# Altium PCB Updated PCB_color Sensor Grp 14.pcbdoc
Units mil, origin at the board's own origin, x right, y up, seen from the top; angles counter-clockwise.
Board outline 4330 x 2560 mil, 2 copper layers (Top Layer, Bottom Layer); 32 components, 40 nets, 110 pads, 0 vias.
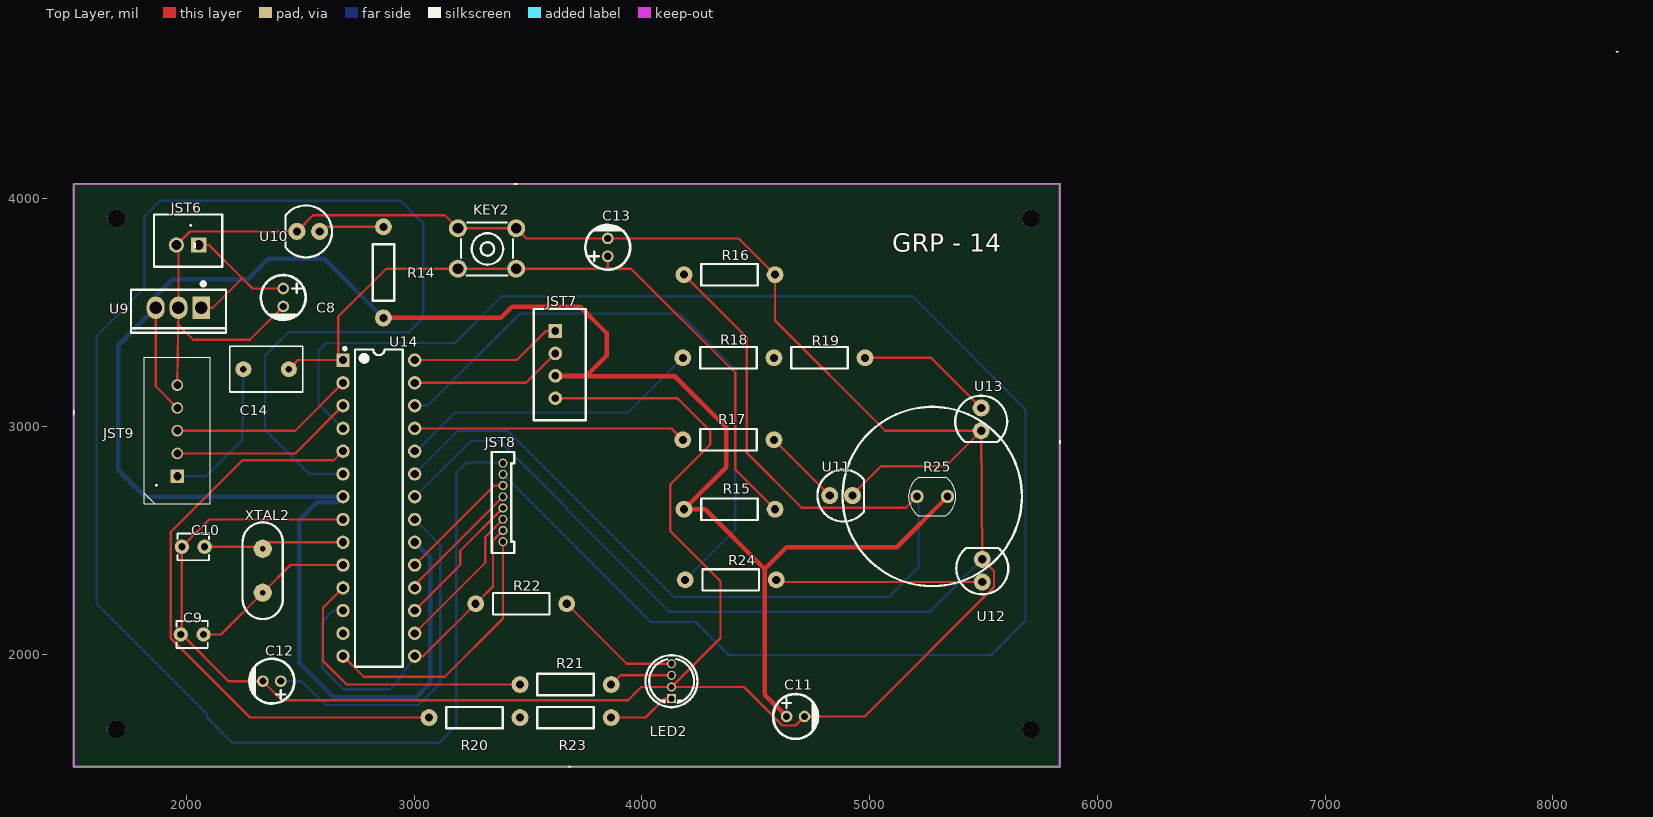
[diagram p0: Top Layer view]
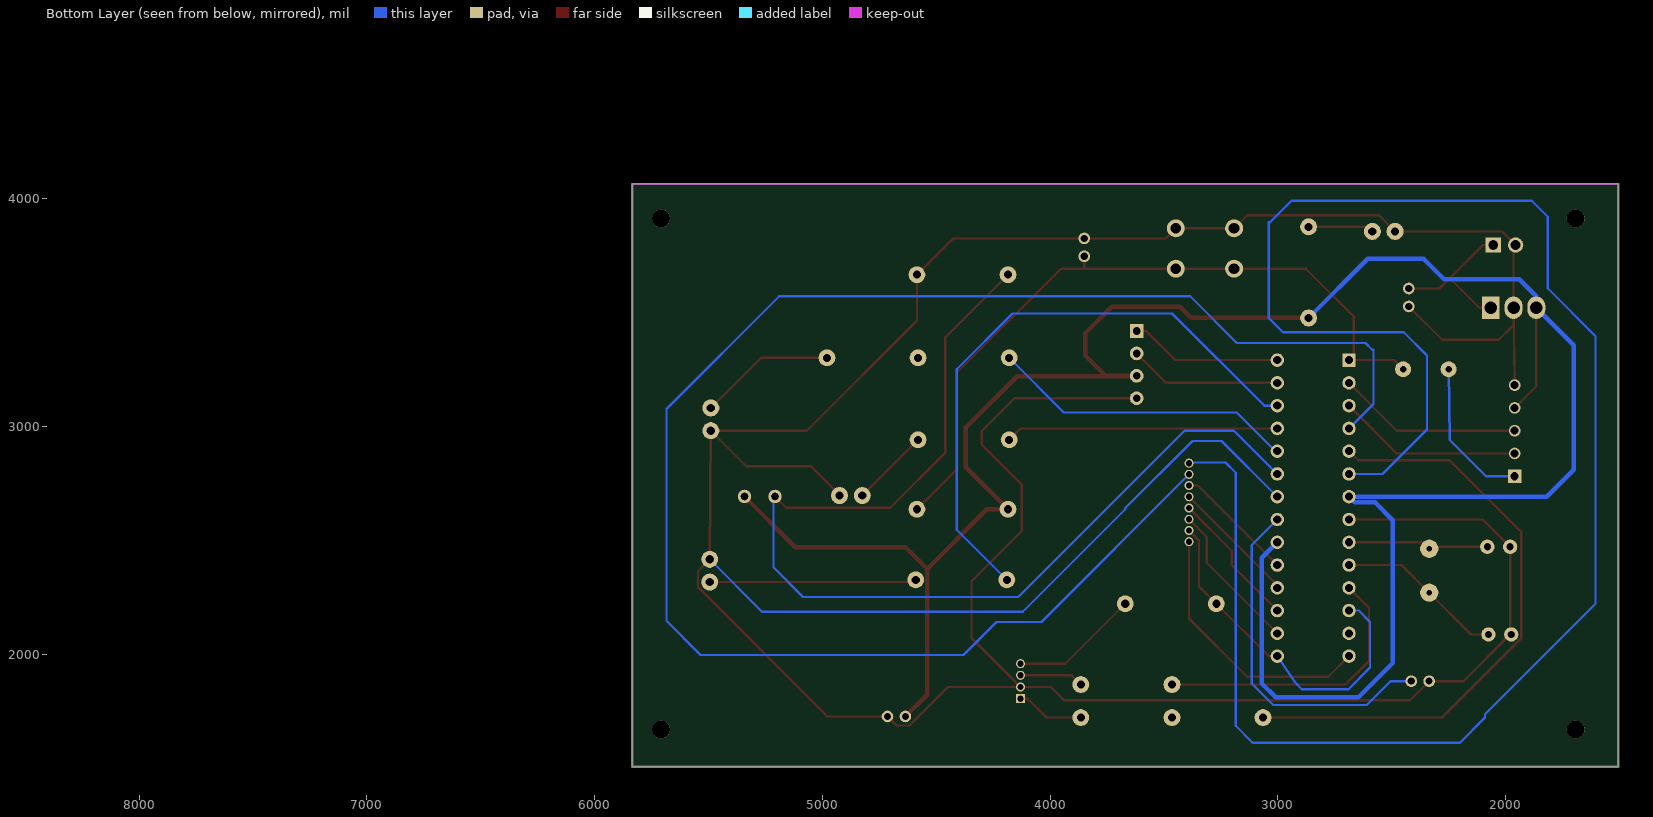
[diagram p1: Bottom Layer view, seen from below]

## Layer stack, top to bottom
Top Solder: solder mask 0.4, Solder Resist, Dk 3.5
Top Layer: signal copper 1.4
Dielectric1: dielectric 12.6, FR-4, Dk 4.8
Bottom Layer: signal copper 1.4
Bottom Solder: solder mask 0.4, Solder Resist, Dk 3.5

## Board outline
5835,1505 1505,1505 1505,4065 5835,4065

## Design rules (kind name [scope] priority, off if disabled: settings)
Clearance [All] p1: gap=10 ignorepadtopadclearanceinfootprint=FALSE except(0: Arc-Hole Track-Hole SMDPad-Hole THPad-Hole Via-Hole Fill-Hole Poly-Hole Region-Hole Text-Hole)
PolygonConnect [All] p1: connectstyle=Relief reliefconductorwidth=10 reliefentries=4 polygonreliefangle="90 Angle" airgapwidth=10
RoutingVias [All] p1: holewidth=28 width=50 viastyle="Through Hole" minholewidth=28 minwidth=50 maxholewidth=28 maxwidth=50
SolderMaskExpansion [All] p1: expansion=4 istentingtop=FALSE
Width [All] p1: maxlimit=10 minlimit=10 preferedwidth=10
30 further rules are at their usual default settings.

## Components (designator, comment, footprint, x,y, rotation, side; value= is the part's Value field where it differs from the comment)
C8 "330nF" CAP-TH_BD5.0-P2.00-D0.8-FD 2425,3565.95 r270 top
C9 "22pF" CAP-TH_L3.5-W3.0-P2.54-D0.8 2025,2085.95 r0 top
C10 "22pF" CAP-TH_L3.5-W3.0-P2.54-D0.8 2030,2470.95 r0 top
C11 "100nF" CAP-TH_BD5.0-P2.00-D0.8-FD 4675,1725.94 r0 top
C12 "100nF" CAP-TH_BD5.0-P2.00-D0.8-FD 2375,1880.94 r180 top
C13 "100nF" CAP-TH_BD5.0-P2.00-D0.8-FD 3850,3785.95 r90 top
C14 "100nF" RAD-0.2 2350,3250.95 r0 top
JST6 "POWER" CONN-TH_XHB-2A 2005,3795.95 r0 top
JST7 "JST_4 PIN" JST_XH_4_PIN_TOP_ENTRY 3620,3270.95 r0 top
JST8 "Keypad" 1X08-1.25MM_JST 3390,2665.95 r90 top
JST9 "FTDI" "JST 2.54MM MALE 5 PIN CONNECTOR" 1960,2980.95 r90 top
KEY2 "RST_BTN" KEY-TH_4P-L6.0-W6.0-P4.50 3320,3780.95 r180 top
LED2 "φ5 RGB Transparent" LED-TH_4P-BD5.8-P1.30 4130,1880.94 r270 top
R14 "330Ω" AXIAL-0.4 2865,3675.95 r90 top
R15 "10K" AXIAL-0.4 4385,2635.95 r180 top
R16 "1K" AXIAL-0.4 4385,3665.95 r0 top
R17 "330Ω" AXIAL-0.4 4380,2940.95 r0 top
R18 "330Ω" AXIAL-0.4 4380,3300.95 r0 top
R19 "330Ω" AXIAL-0.4 4780,3300.95 r0 top
R20 "330Ω" AXIAL-0.4 3265,1720.94 r0 top
R21 "330Ω" AXIAL-0.4 3665,1865.94 r0 top
R22 "330Ω" AXIAL-0.4 3470,2220.95 r0 top
R23 "330Ω" AXIAL-0.4 3665,1720.94 r0 top
R24 "330Ω" AXIAL-0.4 4390,2325.95 r0 top
R25 "LDR07" RESISTOR_LDR_5.1X4.3_RM3.4 5275.16,2692.05 r0 top
U9 "7805_Regulator" TO-220-3_L10.0-W4.5-P2.54-L 1965,3520.95 r180 top
U10 "LED" "5MM LED" 2585,3855.95 r180 top
U11 "GREEN_LED" "5MM LED" 4825,2695.95 r0 top
U12 "BLUE_LED" "5MM LED" 5495,2315.95 r90 top
U13 "RED_LED" "5MM LED" 5490,3080.95 r270 top
U14 "ATMEGA _328P-PU" DIP-28_L34.6-W7.3-P2.54-LS10.2-BL 2845,2640.95 r270 top
XTAL2 "16MHz" "16MHZ_OSC [PCB]" 2335,2365.95 r0 top

## Footprints (in the part's own frame and the unit in brackets; to place one, negate y for a bottom-side part, rotate by r counter-clockwise, add the part's x,y. Pads: shape width x height; smd on the part's side, far side on the other; paste and mask are expansions set on the pad)
1X08-1.25MM_JST [mm]
  round 1 hole 0.701: 1(-4.382,0) 2(-3.132,0) 3(-1.878,0) 4(-0.626,0) 5(0.626,0) 6(1.878,0) 7(3.13,0) 8(4.382,0)
  silkscreen extent -5.63,-1.25 5.63,1.25
"5MM LED" [mm]
  round 1.9 hole 0.914: 1(0,0) 2(2.54,0)
  silkscreen extent -1.37,-2.9 3.81,2.9
"16MHZ_OSC [PCB]" [mil]
  round 80 hole 25: 1(0,96.46) 2(0,-96.46)
  silkscreen extent -88,-212 88,212
AXIAL-0.4 [mil]
  round 74 hole 35.4: 1(-200,0) 2(200,0)
  silkscreen extent -124,-47 124,47
CAP-TH_BD5.0-P2.00-D0.8-FD [mm]
  round 1.3 hole 0.8: 1(-1,0) 2(1,0)
  silkscreen extent -2.5,-2.5 2.5,2.5
CAP-TH_L3.5-W3.0-P2.54-D0.8 [mm]
  round 1.6 hole 0.8: 1(-1.27,0) 2(1.27,0)
  silkscreen extent -1.75,-1.5 1.75,1.5
CONN-TH_XHB-2A [mm]
  rect 1.7x1.7 hole 1.1: 1(1.251,0)
  round 1.7 hole 1.1: 2(-1.251,0)
  silkscreen extent -3.75,-2.42 3.86,3.4
DIP-28_L34.6-W7.3-P2.54-LS10.2-BL [mm]
  rect 1.5x1.5 hole 0.9: 1(-16.51,-4)
  round 1.5 hole 0.9: 2(-13.97,-4) 3(-11.43,-4) 4(-8.89,-4) 5(-6.35,-4) 6(-3.81,-4) 7(-1.27,-4) 8(1.27,-4) 9(3.81,-4) 10(6.35,-4) 11(8.89,-4) 12(11.43,-4) 13(13.97,-4) 14(16.51,-4) 15(16.51,4) 16(13.97,4) 17(11.43,4) 18(8.89,4) 19(6.35,4) 20(3.81,4) 21(1.27,4) 22(-1.27,4) 23(-3.81,4) 24(-6.35,4) 25(-8.89,4) 26(-11.43,4) 27(-13.97,4) 28(-16.51,4)
  silkscreen extent -17.94,-3.95 17.7,2.65
"JST 2.54MM MALE 5 PIN CONNECTOR" [mm]
  rect 1.5x1.5 hole 0.9: 1(-5.08,0)
  round 1.3 hole 0.9: 2(-2.54,0) 3(0,0) 4(2.54,0) 5(5.08,0)
  silkscreen extent -8.17,-3.68 8.21,3.68
JST_XH_4_PIN_TOP_ENTRY [mil]
  rect 60x60 hole 34.25: 1(0,147.6)
  round 60 hole 34.25: 2(0,49.21) 3(0,-49.21) 4(0,-147.64)
  silkscreen extent -94,-244 134,244
KEY-TH_4P-L6.0-W6.0-P4.50 [mm]
  round 2 hole 1.2: 1(-3.25,-2.25) 2(3.25,-2.25) 3(3.25,2.25) 4(-3.25,2.25)
  silkscreen extent -2.9,-2.9 2.9,3
LED-TH_4P-BD5.8-P1.30 [mm]
  rect 1x1 hole 0.7: 1(1.95,0)
  round 1 hole 0.7: 2(0.65,0) 3(-0.65,0) 4(-1.95,0)
  silkscreen extent -2.9,-2.9 2.9,2.9
RAD-0.2 [mil]
  round 70 hole 28: 1(100,0) 2(-100,0)
  silkscreen extent -160,-100 160,100
RESISTOR_LDR_5.1X4.3_RM3.4 [mm]
  round 1.5 hole 0.8 slot 0.805 at 0 deg: 1(-1.7,0) 2(1.701,0)
  silkscreen extent -2.65,-2.15 2.62,2.17
TO-220-3_L10.0-W4.5-P2.54-L [mm]
  rect 2x2.5 hole 1.4: 1(-2.54,0)
  oval 2x2.5 hole 1.4: 2(0,0) 3(2.54,0)
  silkscreen extent -5.3,-2.86 5.3,2.8

## Free pads (board coordinates)
  round 78.74 hole 78.74 unplated: ""(1692.48,1668.42) ""(1692.48,3912.51) ""(5708.23,1668.42) ""(5708.23,3912.51)

## Nets (pads, with @x,y where several pads share a name; then routed paths per layer and width w, separated by ;. In a path a pad name is that pad's centre, name@x,y a point inside that pad or via, vN(x,y) a via of type N, cw(c..) or ccw(c..) an arc to the next point about the centre after c; other vN are vias at no path point)
1: JST8.5 U14.18 | length 560.1
  Top Layer w10: U14.18 3002.5,2303.05 JST8.5@3390,2690.55
2: JST8.6 U14.19 | length 532
  Top Layer w10: U14.19 3351.4,2739.84 JST8.6@3390,2739.84
3: JST8.7 U14.4 | length 7412.6
  Bottom Layer w10: U14.4 2580,3098.45 2580,3335.95 2585,3335.95 2615,3365.95 3180,3365.95 3385,3570.95 5190,3570.95 5685,3075.95 5685,2145.95 5535,1995.94 4380,1995.94 4235,2140.95 4038.2,2140.95 JST8.7@3390,2789.14
4: JST8.8 U14.6 | length 8219.7
  Bottom Layer w10: U14.6 2540,2790.9 2345,2985.9 2345,3310.9 2447.5,3413.4 2977.5,3413.4 3040,3475.9 3040,3895.9 3035,3895.9 2940,3990.9 1885,3990.9 1815,3920.9 1815,3605.9 1605,3395.9 1605,2220.9 2090,1735.9 2090,1720.9 2200,1610.9 3110.9,1610.9 3185,1685 3185,2795.9 3230,2840.9 3387.5,2840.9 JST8.8@3390,2838.4
5V: C11.1 JST7.3 JST9.4 R14.1 R15.2 R25.2 U9.3 U14.7 U14.20 | length 10468.7
  Top Layer w10: U9.3 1865,3175.9 JST9.4
  Top Layer w19.68: R14.1 3380.9,3475.9 3430,3525 3730,3525 3845,3410 3845,3310 3756.7,3221.7 JST7.3 3621.7,3220 4145,3220 4370,2995 4370,2820.9 R15.2 ; R15.2 4277.9,2635.95 4540,2373.74 ; C11.1 4540,1821.55 4540,2373.74 ; R25.2 5119.1,2469.05 4635.2,2469.05 4540,2373.74
  Bottom Layer w19.68: U9.3 1700,3355.9 1700,2810 1819.1,2690.9 U14.7 2662.5,2665.9 2572.7,2665.9 2495,2588.2 2495,1960.9 2645.9,1810 3009.1,1810 3070,1870.9 3070,2423.4 U14.20 ; U9.3 1865,3570.95 1940,3645.95 2270,3645.95 2360,3735.95 2605,3735.95 R14.1
A: JST8.1 U14.14 | length 1183.6
  Top Layer w10: U14.14 2778.4,1900 3134.1,1900 3390,2155.9 JST8.1
B: JST8.2 R22.1 U14.12 U14.15 | length 1567.8
  Top Layer w10: U14.15 3040,1990.94 R22.1 3346.2,2297.14 3346.2,2498.84 JST8.2
  Bottom Layer w10: U14.12 2645,2190.95 2595,2140.95 2595,1940.94 2690,1845.94 2895,1845.94 2925,1875.94 U14.15
BLUE: R24.1 U14.26 | length 2692.9
  Bottom Layer w10: U14.26 3060,3090.95 3465,3495.95 4165,3495.95 4410,3250.95 4410,2545.95 R24.1
C: JST8.3 U14.16 | length 661.6
  Top Layer w10: U14.16 3312.4,2400.84 3312.4,2514.45 JST8.3
C5_2: C14.2 JST9.1 | length 661.9
  Bottom Layer w10: JST9.1 2085.95,2780.95 2245,2940 C14.2
D: JST8.4 U14.17 | length 610.8
  Top Layer w10: U14.17 3202.7,2391.14 3202.7,2453.95 JST8.4@3390,2641.24
G: R21.1 U14.11 | length 1265.3
  Top Layer w10: U14.11 2600,2203.4 2600,1970 2704.1,1865.9 R21.1
GND: C8.2 C9.1 C10.1 C11.2 C12.2 C13.2 JST6.2 JST7.4 JST9.5 KEY2.1 KEY2.2 LED2.2 R16.2 U9.2 U10.2 U11.2 U12.2 U13.2 U14.8 U14.22 | length 17033.1
  Top Layer w10: JST9.5 U9.2 ; C8.2 2278.43,3380 2030,3380 1965,3445 U9.2 ; U14.8 2100,2590.95 C10.1 1980,2085.95 2185,1880.94 C12.2 2419.2,1797.44 3939.6,1797.44 3997.5,1855.35 4130,1855.35 4448.7,1855.35 4617.5,1686.55 4675,1686.55 C11.2 4978.7,1725.94 5546.8,2294.05 5546.8,2364.14 U12.2 ; JST7.4 4156.7,3123.3 4300,2980 4300,2920 4125,2745 4125,2540 4345,2320 4345,2070.3 LED2.2@4130,1855.3 ; R16.2 4585,3465 5069.1,2980.9 U13.2 ; R16.2 4425.6,3825.34 C13.2 3492.2,3825.34 KEY2.1 3192.1,3869.55 3134.5,3927.14 2556.2,3927.14 U10.2 2015.8,3855.95 JST6.2 1965,3786.64 U9.2 ; U11.2 4925,2700 5050,2825 5334.06,2825 U13.2 U12.2
  Top Layer w10.24: C9.1 C9.1@1980,2085.95
  Bottom Layer w10: U14.22 3247.48,2935.95 3375,2935.95 3670,2640.95 3670,2635.95 4120,2185.95 5265,2185.95 U12.2
GREEN: R17.1 U14.25 | length 1198.2
  Top Layer w10: U14.25 4130,2990.95 R17.1
LDR: R16.1 R25.1 U14.23 | length 4725.1
  Top Layer w10: R16.1 4460,3390.9 4460,2885 4702.3,2642.7 5158.9,2642.7 R25.1
  Bottom Layer w10: U14.23 3192.5,2980.95 3410,2980.95 4140,2250.95 5085,2250.95 5215,2380.95 5215,2685.24 R25.1
R: R20.1 U14.5 | length 2648.3
  Top Layer w10: U14.5 2647.4,2850.8 2245.8,2850.8 1931.7,2536.7 1931.7,2067.9 2278.7,1720.9 R20.1
R2_2: R24.2 U12.1 | length 909.1
  Top Layer w10: R24.2 4600,2315.95 U12.1
R3_2: R14.2 U10.1 | length 288.3
  Top Layer w10: U10.1 2605,3875.95 R14.2
R9_1: R18.2 R19.1
R11_2: LED2.3 R21.2 | length 281.8
  Top Layer w10: R21.2 3905.6,1906.55 LED2.3
R12_2: LED2.4 R22.2 | length 569
  Top Layer w10: R22.2 3933.2,1957.74 LED2.4
R13_1: R20.2 R23.1
R13_2: LED2.1 R23.2 | length 299.5
  Top Layer w10: R23.2 4015.6,1720.94 4098.8,1804.14
  Top Layer w10.24: 4098.8,1804.14 LED2.1@4130,1804.14
RED: R18.1 U14.24 | length 1347.3
  Bottom Layer w10: U14.24 3010,2890.95 3180,3060.95 3940,3060.95 R18.1
RESET: C13.1 C14.1 KEY2.3 KEY2.4 R15.1 U14.1 | length 3190.5
  Top Layer w10: C14.1 2490,3290.95 2646.5,3290.95 U14.1@2667,3290.95 ; U14.1@2667,3290.9 2667,3482 2877.3,3692.3 KEY2.3@3192.1,3692.3 ; KEY2.3@3192.1,3692.34 3448,3692.34 3850,3692.34 C13.1@3850,3746.55 ; 3850,3692.3 3952.7,3692.3 4410,3235 4410,2810.9 R15.1
  Top Layer w10.24: U14.1@2667,3290.95 U14.1
RX: JST9.3 U14.2 | length 814.5
  Top Layer w10: JST9.3 2477.5,2980.95 U14.2
S$17: 
S$1303: 
S$1308: 
S$1310: 
S$1312: 
SCL: JST7.1 U14.28 | length 670.4
  Top Layer w10: U14.28 3450.9,3290.95 3578.5,3418.55
  Top Layer w10.24: 3578.5,3418.55 JST7.1
SDA: JST7.2 U14.27 | length 671
  Top Layer w10: U14.27 3490.8,3190.95 JST7.2@3620,3320.14
TX: JST9.2 U14.3 | length 814.5
  Top Layer w10: JST9.2 2477.5,2880.95 U14.3
U1_9: C10.2 U14.9 XTAL2.1 | length 622.8
  Top Layer w10: C10.2 2326.5,2470.95 XTAL2.1 2363.5,2490.95 U14.9
U1_10: C9.2 U14.10 XTAL2.2 | length 738.8
  Top Layer w10: C9.2 2151.5,2085.95 2335,2269.45 2456.5,2390.95 U14.10
U1_21: C12.1 U14.21 | length 1550.1
  Bottom Layer w10: C12.1 2505,1880.94 2610,1775.94 3020,1775.94 3115,1870.94 3115,2478.43 U14.21
U6_1: R17.2 U11.1 | length 346.5
  Top Layer w10: R17.2 U11.1
U8_1: R19.2 U13.1 | length 601.1
  Top Layer w10: R19.2 5270,3300.95 U13.1
VCC: C8.1 JST6.1 U9.1 | length 683.2
  Top Layer w10: JST6.1@2054.3,3795.95 2099.2,3795.95 2245.1,3650.05 ; U9.1 2115.9,3520.95 2245.1,3650.05 ; C8.1 2289.9,3605.34 2245.1,3650.05
pads on no net: U14.13

## Silkscreen, mask and mechanical layers (free items; w line width, h text height)
Top Overlay:
  circle w10: c5275.16,2692.04 r393.7
  lines w7.87: 1505,3050.95 1505,3070 ; 3440,4064.05 3450,4064.05 ; 3680,1505 3687.88,1505 ; 5835.71,2927.13 5835.71,2935 ; 8280,4645.11 8287.87,4645.11
  text "GRP - 14" at 5100,3765.94 h80